# Altium PCB 铜基板拼板.PcbDoc
Units mm, origin at the board's own origin, x right, y up, seen from the top; angles counter-clockwise.
Board outline 156.4 x 92.83 mm, 2 copper layers (Top Layer, Bottom Layer); 16 components, 0 nets, 78 pads, 0 vias.
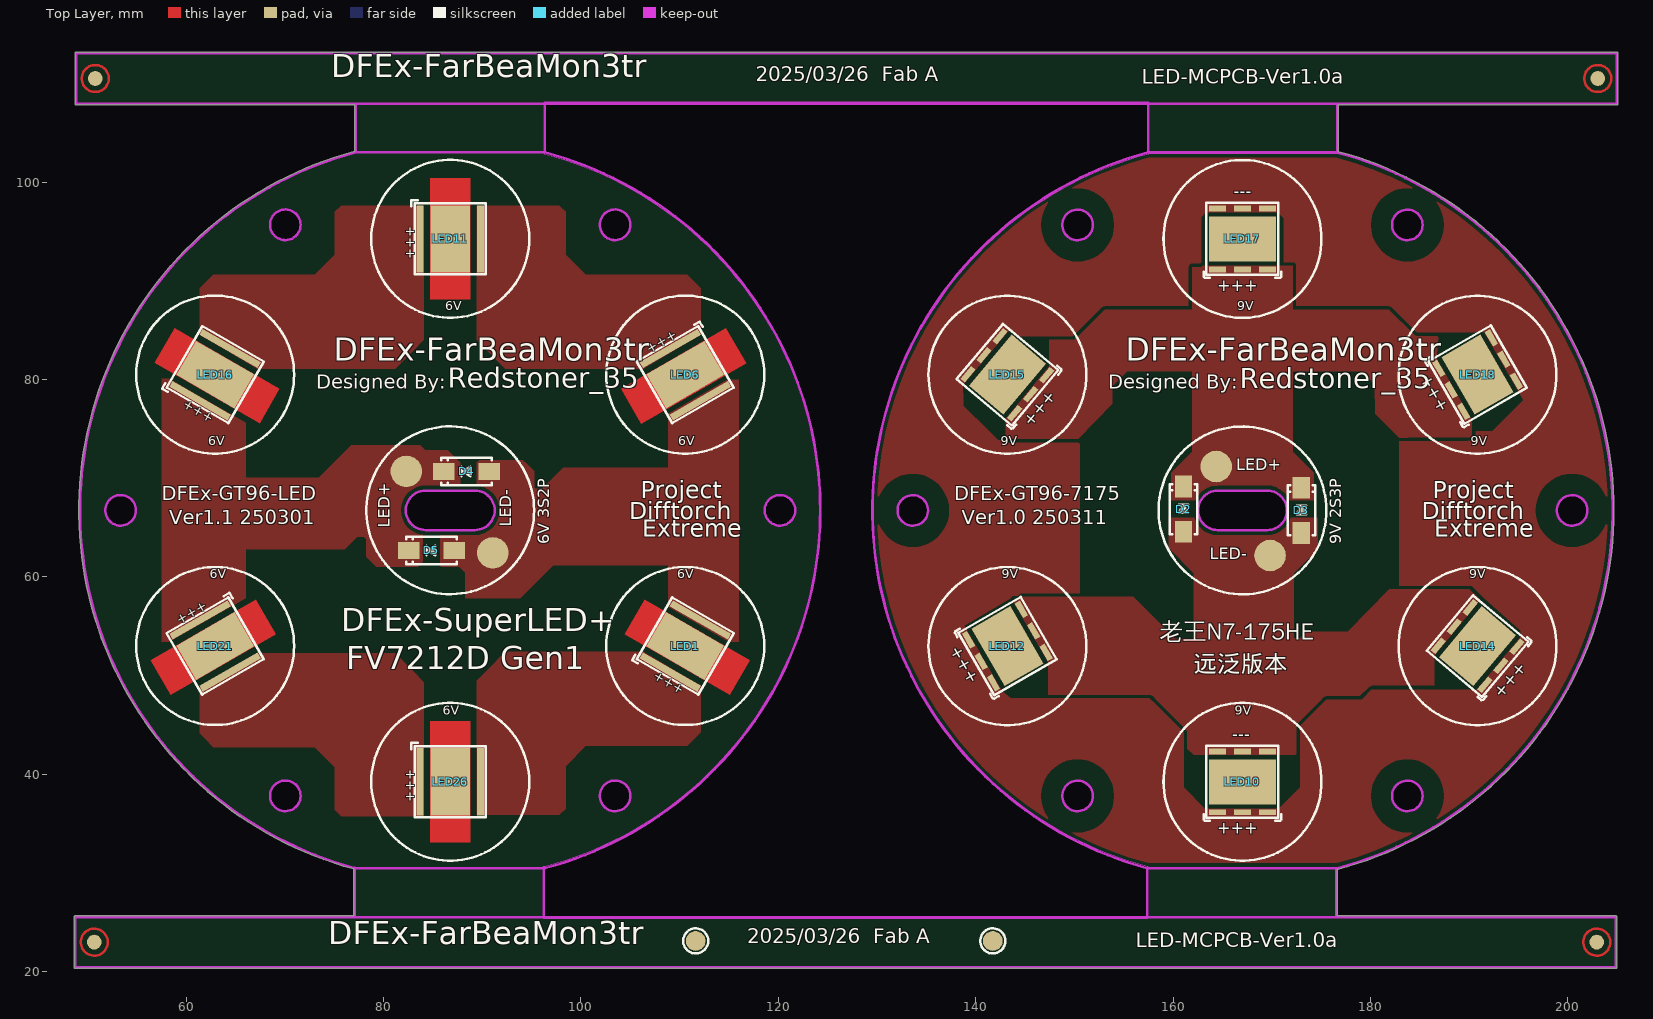
[diagram p0: Top Layer view]
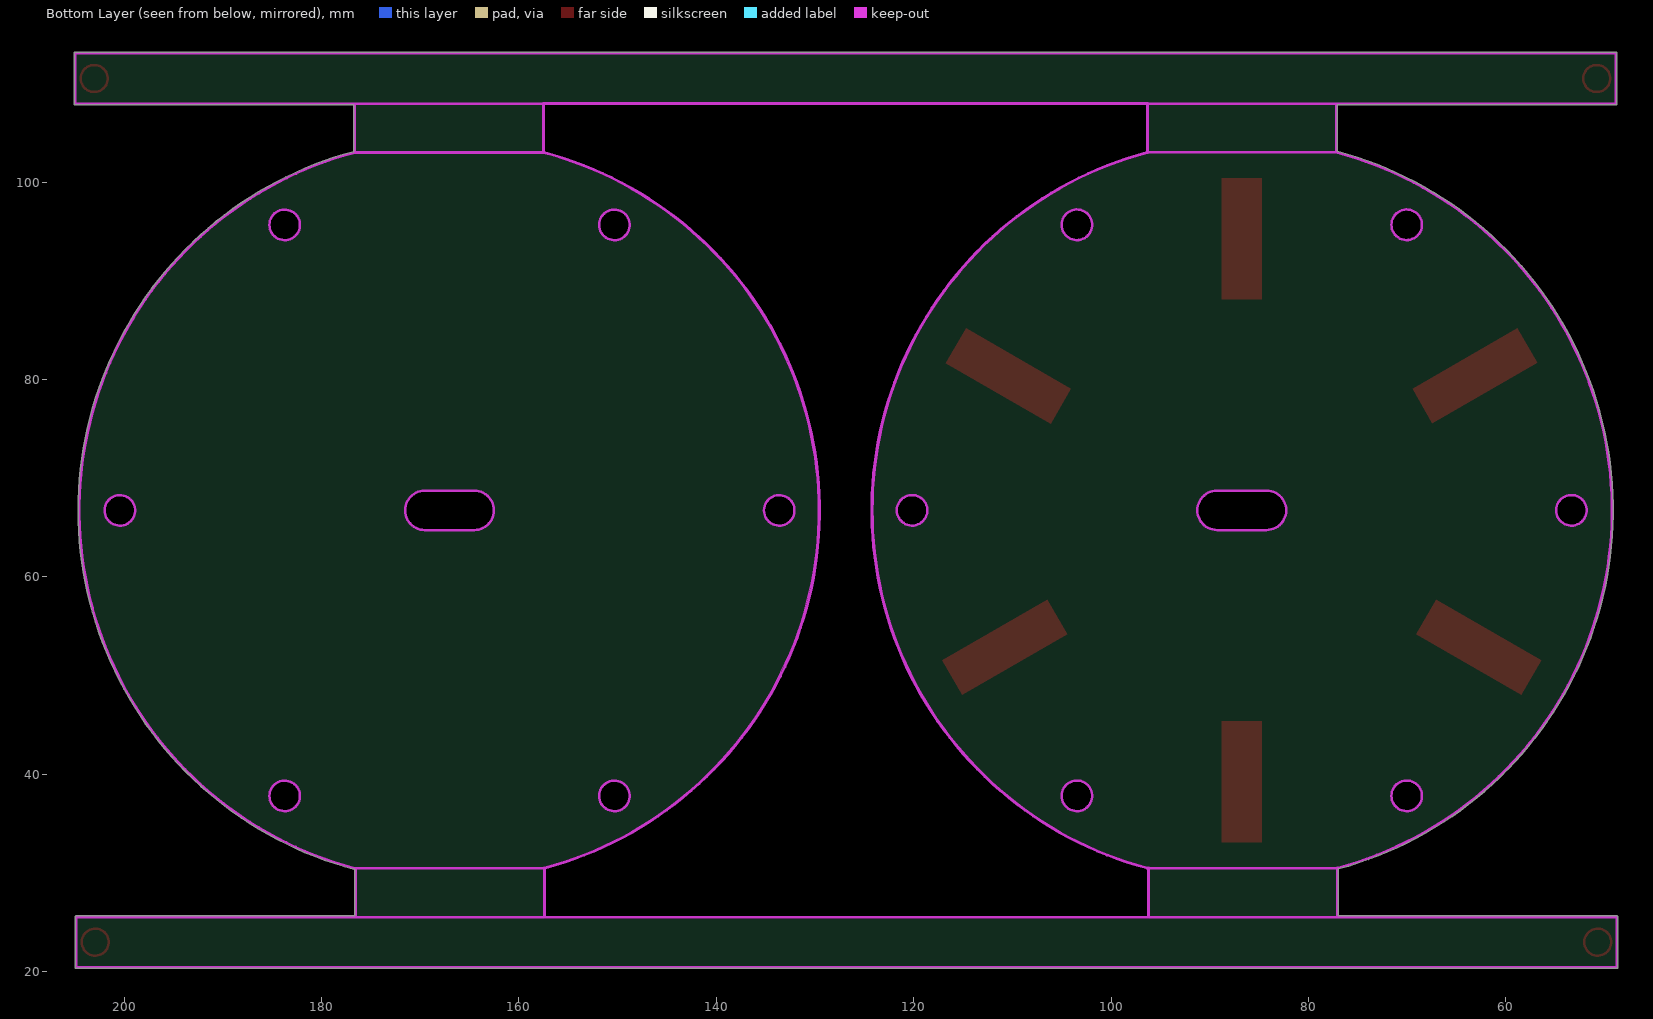
[diagram p1: Bottom Layer view, seen from below]

## Layer stack, top to bottom
Top Solder: solder mask 0.0102, Solder Resist, Dk 3.5
Top Layer: signal copper 0.0356
Dielectric 1: dielectric 0.32, FR-4, Dk 4.8
Bottom Layer: signal copper 0.0356
Bottom Solder: solder mask 0.0102, Solder Resist, Dk 3.5

## Board outline
48.665,20.452 ccw(c48.793,20.452) 48.793,20.324 204.83,20.324 ccw(c204.83,20.452) 204.958,20.452 204.958,25.532 ccw(c204.83,25.532) 204.83,25.659 176.637,25.659 176.637,30.366 176.668,30.366 ccw(c176.668,30.493) 176.701,30.37 ccw(c167.03,66.733) 204.657,66.733 ccw(c167.03,66.733) 176.739,103.087 176.739,107.823 204.933,107.823 ccw(c204.933,107.95) 205.06,107.95 205.06,113.03 ccw(c204.933,113.03) 204.933,113.157 48.895,113.157 ccw(c48.895,113.03) 48.768,113.03 48.768,107.95 ccw(c48.895,107.95) 48.895,107.823 77.089,107.823 77.089,103.103 ccw(c86.766,66.742) 76.986,30.408 76.986,25.659 48.793,25.659 ccw(c48.793,25.532) 48.665,25.532
cut-out: 96.118,25.532 ccw(c96.245,25.532) 96.245,25.404 157.378,25.404 ccw(c157.378,25.532) 157.505,25.532 157.505,30.485 ccw(c157.378,30.485) 157.505,30.491 ccw(c157.378,30.497) 157.505,30.497 ccw(c157.378,30.497) 157.41,30.62 cw(c167.03,66.733) 157.512,102.874 cw(c167.03,66.733) 157.512,102.874 ccw(c157.48,102.997) 157.607,102.997 157.607,107.95 ccw(c157.48,107.95) 157.48,108.077 96.348,108.077 ccw(c96.348,107.95) 96.22,107.95 96.22,102.997 ccw(c96.348,102.997) 96.316,102.874 cw(c86.766,66.742) 124.139,66.742 cw(c86.766,66.742) 96.371,30.625 ccw(c96.404,30.502) 96.314,30.592 ccw(c96.245,30.485) 96.118,30.485
cut-out: 148.779,37.806 cw(c150.329,37.806) 150.329,39.356 cw(c150.329,37.806) 151.879,37.806 cw(c150.329,37.806) 150.329,36.256 cw(c150.329,37.806)
cut-out: 182.181,37.806 ccw(c183.731,37.806) 183.731,36.256 ccw(c183.731,37.806) 185.281,37.806 ccw(c183.731,37.806) 183.731,39.356 ccw(c183.731,37.806)
cut-out: 198.882,66.733 ccw(c200.432,66.733) 200.432,65.183 ccw(c200.432,66.733) 201.982,66.733 ccw(c200.432,66.733) 200.432,68.283 ccw(c200.432,66.733)
cut-out: 182.181,95.66 ccw(c183.731,95.66) 183.731,94.11 ccw(c183.731,95.66) 185.281,95.66 ccw(c183.731,95.66) 183.731,97.21 ccw(c183.731,95.66)
cut-out: 150.329,94.11 cw(c150.329,95.66) 148.779,95.66 cw(c150.329,95.66) 150.329,97.21 cw(c150.329,95.66) 151.879,95.66 cw(c150.329,95.66)
cut-out: 133.628,65.183 cw(c133.628,66.733) 132.078,66.733 cw(c133.628,66.733) 133.628,68.283 cw(c133.628,66.733) 135.178,66.733 cw(c133.628,66.733)
cut-out: 164.53,64.733 169.53,64.733 ccw(c169.53,66.733) 169.53,68.733 164.53,68.733 ccw(c164.53,66.733)
cut-out: 84.266,64.742 89.266,64.742 ccw(c89.266,66.742) 89.266,68.742 84.266,68.742 ccw(c84.266,66.742)
cut-out: 53.364,65.192 cw(c53.364,66.742) 51.814,66.742 cw(c53.364,66.742) 53.364,68.292 cw(c53.364,66.742) 54.914,66.742 cw(c53.364,66.742)
cut-out: 70.065,94.119 cw(c70.065,95.669) 68.515,95.669 cw(c70.065,95.669) 70.065,97.219 cw(c70.065,95.669) 71.615,95.669 cw(c70.065,95.669)
cut-out: 101.917,95.669 ccw(c103.467,95.669) 103.467,94.119 ccw(c103.467,95.669) 105.017,95.669 ccw(c103.467,95.669) 103.467,97.219 ccw(c103.467,95.669)
cut-out: 118.618,66.742 ccw(c120.168,66.742) 120.168,65.192 ccw(c120.168,66.742) 121.718,66.742 ccw(c120.168,66.742) 120.168,68.292 ccw(c120.168,66.742)
cut-out: 101.917,37.815 ccw(c103.467,37.815) 103.467,36.265 ccw(c103.467,37.815) 105.017,37.815 ccw(c103.467,37.815) 103.467,39.365 ccw(c103.467,37.815)
cut-out: 68.515,37.815 cw(c70.065,37.815) 70.065,39.365 cw(c70.065,37.815) 71.615,37.815 cw(c70.065,37.815) 70.065,36.265 cw(c70.065,37.815)

## Design rules (kind name [scope] priority, off if disabled: settings)
Clearance [All] p1: gap=0.254
PolygonConnect [All] p1: connectstyle=Relief reliefconductorwidth=0.254 reliefentries=4 polygonreliefangle="90 Angle" airgapwidth=0.254
RoutingVias [All] p1: holewidth=0.711 width=1.27 viastyle="Through Hole" minholewidth=0.711 minwidth=1.27 maxholewidth=0.711 maxwidth=1.27
SolderMaskExpansion [All] p1: expansion=0.102
Width [All] p1: maxlimit=0.254 minlimit=0.254 preferedwidth=0.254
30 further rules are at their usual default settings.

## Components (designator, comment, footprint, x,y, rotation, side; value= is the part's Value field where it differs from the comment)
D2 "SB2060L" SMA 161.061,66.86 r90 top
D3 "SB2060L" SMA 172.999,66.733 r90 top
D4 "SB2060L" SMA 88.417,70.679 r180 top
D5 "SB2060L" SMA 84.861,62.678 r180 top
LED1 "FV7012I" XHP70.3HI 110.582,52.992 r240 top
LED6 "FV7012I" XHP70.3HI 110.582,80.492 r120 top
LED10 "FV7012I" N7175HE 167.03,39.233 r180 top
LED11 "FV7012I" XHP70.3HI 86.766,94.242 r180 top locked
LED12 "FV7012I" N7175HE 143.214,52.983 r120 top
LED14 "FV7012I" N7175HE 190.846,52.983 r230 top
LED15 "FV7012I" N7175HE 143.214,80.483 r230 top
LED16 "FV7012I" XHP70.3HI 62.95,80.492 r240 top locked
LED17 "FV7012I" N7175HE 167.03,94.233 r180 top
LED18 "FV7012I" N7175HE 190.846,80.483 r120 top
LED21 "FV7012I" XHP70.3HI 62.95,52.992 r120 top
LED26 "FV7012I" XHP70.3HI 86.766,39.242 r180 top locked

## Footprints (in the part's own frame and the unit in brackets; to place one, negate y for a bottom-side part, rotate by r counter-clockwise, add the part's x,y. Pads: shape width x height; smd on the part's side, far side on the other; paste and mask are expansions set on the pad)
N7175HE [mm] "夜巡老王N7-175HE灯珠（达立半导体A6-N60）"
  rect 6.76x4.56 smd mask+0.03: 0(0,0)
  rect 1.72x0.6 smd mask+0.03: W1N(-2.52,-3.08) W1P(-2.52,3.08) W2N(0,-3.08) W2P(0,3.08) W3N(2.52,-3.08) W3P(2.52,3.08)
  silkscreen extent -3.94,-3.65 3.94,3.94, body extent -3.68,-3.68 3.68,3.68, height 0.7
SMA [mm] "4.5x2.6*2.2mm（长宽高，不包括引脚）"
  rect 2.2x1.75 smd: 1(-2.3,0) 2(2.3,0)
  silkscreen extent -2.54,-1.4 2.54,1.4, body extent -2.53,-1.3 2.58,1.3, height 2.15
XHP70.3HI [mm] "第三代CREE XHP70 LED，平头HI版本"
  rect 4x6.8 smd mask+0.03: 0(0,0)
  rect 0.7x6.8 smd mask+0.03: 1(-3.05,0) 2(3.05,0)
  silkscreen extent -3.6,-3.94 3.94,3.6

## Free pads (board coordinates)
  round 1.5 smd mask+0.03: 0(50.698,22.992) 0(50.8,110.49) 0(202.925,22.992) 0(203.028,110.49)
  round 3.2 smd mask+0.03: 1(82.321,70.679) 1(164.363,71.178) 2(91.084,62.424) 2(169.824,62.161)
  round 2 smd mask+0.03: 1(141.732,23.114) 2(111.633,23.114)

## Nets (pads, with @x,y where several pads share a name; then routed paths per layer and width w, separated by ;. In a path a pad name is that pad's centre, name@x,y a point inside that pad or via, vN(x,y) a via of type N, cw(c..) or ccw(c..) an arc to the next point about the centre after c; other vN are vias at no path point)
pads on no net: D2.1 D2.2 D3.1 D3.2 D4.1 D4.2 D5.1 D5.2 LED1.0 LED1.1 LED1.2 LED6.0 LED6.1 LED6.2 LED10.0 LED10.W1N LED10.W1P LED10.W2N LED10.W2P LED10.W3N LED10.W3P LED11.0 LED11.1 LED11.2 LED12.0 LED12.W1N LED12.W1P LED12.W2N LED12.W2P LED12.W3N LED12.W3P LED14.0 LED14.W1N LED14.W1P LED14.W2N LED14.W2P LED14.W3N LED14.W3P LED15.0 LED15.W1N LED15.W1P LED15.W2N LED15.W2P LED15.W3N LED15.W3P LED16.0 LED16.1 LED16.2 LED17.0 LED17.W1N LED17.W1P LED17.W2N LED17.W2P LED17.W3N LED17.W3P LED18.0 LED18.W1N LED18.W1P LED18.W2N LED18.W2P LED18.W3N LED18.W3P LED21.0 LED21.1 LED21.2 LED26.0 LED26.1 LED26.2
copper on no net: | length 34.4
  Top Layer w0.254: 52.065,22.992 ccw(c50.698,22.992) 52.065,22.992 ; 52.168,110.49 ccw(c50.8,110.49) 52.168,110.49 ; 204.293,22.992 ccw(c202.925,22.992) 204.293,22.992 ; 204.396,110.49 ccw(c203.028,110.49) 204.396,110.49

## Polygon pours and split planes (outlines as drawn)
no net on Top Layer "Component Side-No Net 1" (solid, remove dead copper, pour order 26): 195.478,77.909 195.478,74.734 189.89,74.734 189.89,70.162 189.89,70.035 196.494,70.035 198.018,70.035 198.018,73.464 198.018,81.592 197.637,81.592 194.081,81.592 194.081,80.83
no net on Top Layer "Component Side-No Net 1" (solid, remove dead copper, pour order 25): 184.724,84.767 173.38,84.767 171.856,86.291 171.348,86.799 171.348,93.276 171.348,96.197 170.736,96.81 170.459,97.086 169.824,97.086 162.966,97.086 162.331,96.451 162.458,96.324 162.458,89.085 162.458,85.656 162.077,85.275 161.95,85.148 157.251,85.148 152.933,85.148 152.679,85.402 151.663,86.418 151.663,92.641 151.663,99.85 153.534,101.721 153.977,101.277 175.92,101.277 184.048,101.277 184.556,101.785 186.08,103.309 186.08,103.563
no net on Top Layer "Component Side-No Net 1" (solid, pour order 24): 187.35,59.113 182.905,59.113 182.905,73.718 191.541,73.718 191.795,73.972 194.081,73.972 192.684,72.575 192.684,59.113
no net on Top Layer "Component Side-No Net 1" (solid, pour order 23): 142.011,73.845 150.393,73.845 150.52,73.718 150.52,69.527 150.52,57.97 150.139,57.589 149.631,58.097 142.519,58.097 142.011,58.097 141.376,57.462 141.249,57.589 138.582,57.589 138.582,74.115 138.892,74.425
no net on Top Layer "Component Side-No Net 1" (solid, remove dead copper, pour order 21): 172.237,41.968 176.682,41.841 178.079,42.857 179.476,44.381 185.064,48.445 185.826,48.445 186.461,48.445 186.461,52.001 191.16,57.716 190.017,58.732 188.239,58.732 181.889,58.732 177.698,54.414 173.507,54.414 172.872,53.779 169.951,53.779 169.316,53.144 169.316,41.968
no net on Top Layer "Component Side-No Net 1" (solid, remove dead copper, pour order 22): 162.077,41.968 161.061,42.984 161.061,44.254 157.632,47.683 148.742,47.683 147.98,47.683 147.345,47.683 147.345,51.366 143.916,57.335 143.916,57.97 145.567,57.97 155.219,57.97 155.981,57.97 160.236,53.716 163.157,53.716 163.855,53.017 164.49,52.382 164.49,41.968
no net on Top Layer "Component Side-No Net 1" (solid, remove dead copper, pour order 17): 169.316,64.733 169.23,64.82 164.077,64.82 163.973,64.82 162.077,62.923 162.077,49.334 162.077,41.968 167.538,41.968 172.237,41.968 172.237,50.858 172.237,62.82 170.238,64.82
no net on Top Layer "Component Side-No Net 1" (solid, remove dead copper, pour order 19): 190.271,75.877 186.715,82.1 186.863,84.64 184.407,84.577 181.93,87.053 171.539,87.053 171.539,86.609 171.539,80.83 179.095,80.83 180.429,79.497 180.492,76.512 182.905,74.099 190.271,74.163
no net on Top Layer "Component Side-No Net 1" (solid, remove dead copper, pour order 20): 143.027,76.004 147.472,81.338 147.472,84.386 149.844,84.386 152.511,87.053 162.712,87.053 162.712,86.418 162.712,80.83 155.346,80.83 153.822,79.306 153.822,77.528 150.393,73.972 143.027,73.972
no net on Top Layer "Component Side-No Net 1" (solid, remove dead copper, pour order 18): 164.871,68.733 164.957,68.647 170.111,68.647 170.214,68.647 172.11,70.543 172.11,84.132 172.11,91.498 166.649,91.498 161.95,91.498 161.95,82.608 161.95,70.647 163.95,68.647
no net on Top Layer "Component Side-No Net 1" (solid, remove dead copper, pour order 15): 195.478,77.909 185.064,67.495 185.064,62.669 185.064,61.399 186.842,59.621 187.35,59.113 189.636,59.113 190.271,59.113 191.541,57.843 195.224,54.541 195.224,53.906 190.779,48.572 180.111,48.572 179.095,47.556 176.428,47.556 175.539,47.556 173.507,45.524 172.872,44.889 172.872,40.444 172.872,38.666 171.348,37.142 170.713,36.507 163.22,36.507 161.061,38.666 161.061,43.238 161.061,44.254 157.632,47.683 143.535,47.683 142.646,48.445 138.836,55.049 144.043,58.097 144.297,58.097 145.186,58.986 145.186,61.272 145.186,61.907 144.17,62.923 143.662,62.415 125.374,62.415 125.374,28.379 124.739,27.744 133.502,18.981 176.682,18.981 213.385,18.981 216.179,21.775 221.64,27.236 221.64,83.497
no net on Top Layer "Component Side-No Net 1" (solid, remove dead copper, pour order 14): 191.541,84.767 184.175,84.767 177.571,91.371 177.444,91.498 172.999,91.498 171.602,91.498 171.221,91.879 171.221,95.943 171.221,96.324 170.586,96.959 168.681,96.959 163.347,96.959 162.966,96.578 162.839,96.451 162.839,93.403 162.839,91.879 162.331,91.371 157.378,91.371 157.124,91.371 150.139,84.386 144.678,84.386 144.424,84.386 143.916,84.894 143.281,84.894 138.709,79.433 138.836,74.607 138.836,74.48 141.503,71.813 145.186,68.13 145.186,61.78 145.186,61.272 144.297,60.383 143.662,59.748 126.644,59.748 126.644,95.689 125.755,96.578 139.217,110.04 139.217,110.421 173.507,110.421 174.523,111.437 178.46,107.5 200.177,107.5 204.241,107.5 212.75,98.991 213.766,97.975 213.766,77.02 213.766,71.051 213.512,70.797 212.623,69.908 200.685,69.908 199.923,69.908 195.097,78.671
no net on Top Layer "Component Side-No Net 1" (solid, remove dead copper, pour order 16): 138.455,77.655 141.503,74.607 143.281,72.829 145.186,70.924 145.186,66.152 145.186,64.32 138.836,55.049 139.852,53.017 132.486,53.652 132.486,72.956 132.232,73.21 132.232,74.099 132.486,74.353
no net on Top Layer "Component Side-No Net 1" (solid, remove dead copper, pour order 35): 170.628,69.062 170.628,67.961 170.713,67.876 170.84,67.749 174.269,67.749 174.269,70.543 173.38,71.432 171.729,73.083 168.808,73.083 162.331,73.083 159.791,70.543 159.791,67.749 169.824,67.749 170.205,68.13
no net on Top Layer "Component Side-No Net 1" (solid, remove dead copper, pour order 37): 159.537,65.971 174.65,65.971 174.65,62.796 172.237,60.383 163.855,60.383 162.077,60.383 159.537,62.923 159.537,64.32
no net on Top Layer "Component Side-No Net 1" (solid, remove dead copper, pour order 16): 84.099,35.754 84.099,49.343 82.956,50.486 81.178,52.264 67.208,52.264 61.366,48.835 61.366,45.787 61.366,44.263 61.366,44.136 61.874,43.628 62.763,42.739 65.811,42.739 73.05,42.739 75.082,40.707 75.082,36.897 75.082,36.389 75.717,35.754
no net on Top Layer "Component Side-No Net 1" (solid, remove dead copper, pour order 17): 84.099,97.603 84.099,84.014 82.956,82.871 81.178,81.093 67.208,81.093 61.366,84.522 61.366,87.57 61.366,89.094 61.366,89.221 61.874,89.729 62.763,90.618 65.811,90.618 73.05,90.618 75.082,92.65 75.082,96.46 75.082,96.968 75.717,97.603
no net on Top Layer "Component Side-No Net 1" (solid, remove dead copper, pour order 18): 89.433,35.881 89.433,49.47 90.576,50.613 92.354,52.391 106.324,52.391 112.166,48.962 112.166,45.914 112.166,44.39 112.166,44.263 111.658,43.755 110.769,42.866 107.721,42.866 100.482,42.866 98.45,40.834 98.45,37.024 98.45,36.516 97.815,35.881
no net on Top Layer "Component Side-No Net 1" (solid, remove dead copper, pour order 19): 89.433,97.603 89.433,84.014 90.576,82.871 92.354,81.093 106.324,81.093 112.166,84.522 112.166,87.57 112.166,89.094 112.166,89.221 111.658,89.729 110.769,90.618 107.721,90.618 100.482,90.618 98.45,92.65 98.45,96.46 98.45,96.968 97.815,97.603
no net on Top Layer "Component Side-No Net 1" (solid, remove dead copper, pour order 14): 84.266,68.751 84.226,68.791 84.226,72.584 84.226,72.838 83.845,73.219 83.718,73.346 81.559,73.346 76.733,73.346 74.701,71.314 73.431,70.044 62.509,70.044 62.509,61.027 64.287,62.805 69.621,62.805 76.098,62.805 78.13,64.837 79.455,66.161 82.352,66.161
no net on Top Layer "Component Side-No Net 1" (solid, remove dead copper, pour order 13): 57.556,79.823 57.556,80.077 58.318,80.077 66.065,75.632 66.065,72.965 66.065,57.834 65.676,57.611 64.541,56.963 58.318,53.407 57.556,53.407
no net on Top Layer "Component Side-No Net 1" (solid, remove dead copper, pour order 12): 108.737,61.154 98.704,61.154 97.18,61.154 94.767,58.741 93.878,57.852 88.29,57.852 88.29,67.123 87.909,67.504 88.036,67.631 94.513,67.631 94.767,67.631 97.688,70.552 98.196,71.06 112.928,71.06 112.928,61.662 112.42,61.154
no net on Top Layer "Component Side-No Net 1" (solid, remove dead copper, pour order 11): 114.833,79.95 115.976,79.95 115.976,72.838 115.976,53.407 114.96,53.407 108.864,56.963 108.864,76.521
no net on Top Layer "Component Side-No Net 1" (solid, remove dead copper, pour order 23): 89.462,68.732 89.462,71.597 89.687,71.822 92.1,71.822 94.132,71.822 94.513,71.441 95.275,70.679 95.275,69.028 95.402,68.901 96.291,68.901 96.037,68.012 96.037,65.345 96.037,64.456 95.275,63.694 91.465,59.884 90.068,59.884 88.798,59.884 87.655,61.027 85.877,61.027 85.75,61.154 85.75,64.742 85.75,65.345 85.877,65.472 88.544,68.139 89.052,68.139
no net on Top Layer "Component Side-No Net 1" (solid, remove dead copper, pour order 25): 86.512,72.838 87.528,71.822 87.655,71.695 87.782,71.568 87.782,68.742 87.782,65.345 87.02,64.583 86.861,64.742 84.353,64.742 84.353,64.71 83.972,64.329 83.972,63.186 83.972,61.535 83.464,61.027 80.162,61.027 79.273,61.027 78.257,62.043 78.257,63.567 78.257,63.821 78.003,64.075 76.86,64.075 76.86,67.123 76.606,67.377 77.495,68.266 77.495,72.838

## Keep-outs
Keep-Out Layer:
  circle w0.254: c200.432,66.733 r1.55
  circle w0.254: c183.731,37.806 r1.55
  circle w0.254: c150.322,37.806 r1.55
  circle w0.254: c133.628,66.733 r1.55
  circle w0.254: c150.322,95.66 r1.55
  circle w0.254: c183.731,95.66 r1.55
  circle w0.254: c103.467,95.669 r1.55
  circle w0.254: c70.058,95.669 r1.55
  circle w0.254: c53.364,66.742 r1.55
  circle w0.254: c70.058,37.815 r1.55
  circle w0.254: c103.467,37.815 r1.55
  circle w0.254: c120.168,66.742 r1.55
  lines w0.254: 77.114,30.502 96.404,30.502 ccw(c86.766,66.742) 96.348,102.997 ; 77.114,30.505 cw(c86.766,66.742) 77.216,103.005 ; 157.378,30.497 cw(c167.03,66.733) 157.48,102.997 ; 157.48,102.989 176.612,102.989 cw(c167.03,66.733) 176.668,30.493 157.378,30.493 176.509,30.493 ; 77.114,25.532 77.114,30.485 96.245,30.485 96.245,26.339 96.245,25.532 ; 77.114,25.532 96.245,25.532 ; 77.114,25.532 48.793,25.532 48.793,20.452 204.83,20.452 204.83,25.532 176.509,25.532 ; 77.216,107.95 48.895,107.95 48.895,113.03 204.933,113.03 204.933,107.95 176.612,107.95 ; 77.216,107.95 96.348,107.95 ; 77.216,107.95 77.216,102.997 96.348,102.997 ; 96.245,25.532 153.822,25.532 157.378,25.532 ; 96.348,102.997 96.348,107.143 96.348,107.95 ; 96.348,107.95 153.924,107.95 157.48,107.95 ; 157.378,25.532 176.509,25.532 ; 157.378,25.532 157.378,30.485 176.509,30.485 176.509,26.339 176.509,25.532 ; 157.48,102.997 176.612,102.997 176.612,107.143 176.612,107.95 ; 157.48,102.997 157.48,107.95 ; 157.48,107.95 176.612,107.95 ; 84.266,64.742 cw(c84.266,66.742) 84.266,68.742 89.266,68.742 cw(c89.266,66.742) 89.266,64.742 84.266,64.742 ; 164.53,64.733 cw(c164.53,66.733) 164.53,68.733 169.53,68.733 cw(c169.53,66.733) 169.53,64.733 164.53,64.733

## Other copper
Top Layer:
  region: 56.407,51.561 58.44,48.038 69.109,54.198 67.075,57.72
  region: 104.038,79.061 106.1,75.49 116.768,81.65 114.707,85.22
  region: 106.457,57.72 104.423,54.198 115.092,48.038 117.126,51.561
  region: 58.826,85.22 56.787,81.69 67.456,75.53 69.494,79.061
  rectangle: 84.734,33.078 88.798,45.397
  rectangle: 84.734,88.078 88.798,100.397

## Silkscreen, mask and mechanical layers (free items; w line width, h text height)
Top Overlay:
  circle w0.254: c141.732,23.114 r1.27
  circle w0.254: c111.633,23.114 r1.27
  circle w0.254: c167.03,66.733 r8.5
  circle w0.254: c143.214,80.483 r8
  circle w0.254: c143.214,52.983 r8
  circle w0.254: c167.03,39.233 r8
  circle w0.254: c190.846,52.983 r8
  circle w0.254: c190.846,80.483 r8
  circle w0.254: c167.03,94.233 r8
  circle w0.254: c86.766,94.242 r8
  circle w0.254: c110.582,80.492 r8
  circle w0.254: c110.582,52.992 r8
  circle w0.254: c86.766,39.242 r8
  circle w0.254: c62.95,52.992 r8
  circle w0.254: c62.95,80.492 r8
  circle w0.254: c86.766,66.742 r8.5
  text "DFEx-FarBeaMon3tr" at 74.701,109.795 h4
  text "2025/03/26  Fab A" at 117.729,109.728 h2.54
  text "LED-MCPCB-Ver1.0a" at 156.845,109.474 h2.54
  text "---" at 166.141,98.102 h2
  text "6V" at 86.258,86.681 h1.6
  text "9V" at 166.522,86.672 h1.6
  text "DFEx-FarBeaMon3tr" at 74.955,81.093 h4
  text "DFEx-FarBeaMon3tr" at 155.219,81.084 h4
  text "Designed By:" at 73.177,78.553 h2.5
  text "Designed By:" at 153.441,78.544 h2.5
  text "Redstoner_35" at 86.512,78.426 h3.5
  text "Redstoner_35" at 166.776,78.417 h3.5
  text "6V" at 62.255,72.965 h1.6
  text "6V" at 109.88,72.965 h1.6
  text "9V" at 142.519,72.956 h1.6
  text "9V" at 190.144,72.956 h1.6
  text "LED+" at 166.395,70.416 h2
  text "Project" at 106.07,67.377 h3
  text "Project" at 186.334,67.368 h3
  text "DFEx-GT96-LED" at 57.556,67.25 h2.5
  text "DFEx-GT96-7175" at 137.82,67.241 h2.5
  text "Difftorch" at 104.927,65.218 h3
  text "Difftorch" at 185.191,65.209 h3
  text "LED-" at 93.37,65.091 h2 r90
  text "LED+" at 81.051,64.964 h2 r90
  text "Ver1.1 250301" at 58.318,64.837 h2.5
  text "Ver1.0 250311" at 138.582,64.828 h2.5
  text "Extreme" at 106.197,63.44 h3
  text "Extreme" at 186.461,63.431 h3
  text "6V 3S2P" at 97.18,63.313 h2 r90
  text "9V 2S3P" at 177.444,63.304 h2 r90
  text "LED-" at 163.728,61.399 h2
  text "6V" at 62.382,59.503 h1.6
  text "6V" at 109.753,59.503 h1.6
  text "9V" at 142.646,59.494 h1.6
  text "9V" at 190.017,59.494 h1.6
  text "DFEx-SuperLED+" at 75.717,53.661 h4
  text "老王N7-175HE" at 158.648,53.017 h3
  text "FV7212D Gen1" at 76.225,49.851 h4
  text "远泛版本" at 162.077,49.715 h3
  text "6V" at 86.004,45.66 h1.6
  text "9V" at 166.268,45.651 h1.6
  text "---" at 166.014,43.111 h2
  text "2025/03/26  Fab A" at 116.84,22.352 h2.54
  text "DFEx-FarBeaMon3tr" at 74.422,21.971 h4
  text "LED-MCPCB-Ver1.0a" at 156.21,21.971 h2.54
Top Solder:
  circle w0.508: c50.698,22.992 r0.889
  circle w0.508: c202.925,22.992 r0.889
  circle w0.508: c203.028,110.49 r0.889
  circle w0.508: c50.8,110.49 r0.889
  region: 105.054,78.426 106.007,76.776 106.777,77.221 105.824,78.87
  region: 114.008,83.632 114.96,81.982 115.73,82.426 114.778,84.076
  region: 57.423,50.926 58.375,49.276 59.145,49.721 58.193,51.37
  region: 66.376,56.132 67.329,54.482 68.099,54.926 67.146,56.576
  region: 115.34,51.37 114.387,49.721 115.157,49.276 116.11,50.926
  region: 106.386,56.576 105.434,54.926 106.204,54.482 107.156,56.132
  region: 58.755,84.076 57.802,82.426 58.572,81.982 59.525,83.632
  region: 67.708,78.87 66.756,77.221 67.526,76.776 68.478,78.426
  rectangle: 85.877,43.873 87.782,44.762
  rectangle: 86.004,33.459 87.909,34.348
  rectangle: 86.004,88.459 87.909,89.348
  rectangle: 85.877,98.873 87.782,99.762
  lines w2: 148.615,44.127 154.584,44.127 156.743,41.968 156.743,33.84 ; 149.885,88.45 151.155,89.72 154.711,89.72 157.251,92.26 157.251,100.261 ; 177.063,99.372 177.063,92.768 179.73,90.101 185.572,90.101 186.334,89.339 ; 177.444,33.713 177.444,41.333 180.619,44.508 184.429,44.508 185.191,44.508
Mechanical 3:
  lines w0.254: 40.919,30.497 47.142,30.497 ; 41.021,102.997 47.244,102.997 ; 46.126,29.481 47.142,30.497 ; 46.126,31.513 47.142,30.497 ; 46.228,101.981 47.244,102.997 ; 46.228,104.013 47.244,102.997 ; 48.793,30.489 204.831,30.489 ; 48.895,102.989 204.933,102.989
  text "V-CUT" at 33.528,102.235 h2.54
  text "V-CUT" at 33.426,29.735 h2.54
Mechanical 6:
  circle w0.254: c183.731,95.66 r3.2
  circle w0.254: c200.432,66.733 r3.2
  circle w0.254: c183.731,37.806 r3.2
  circle w0.254: c150.329,37.806 r3.2
  circle w0.254: c133.628,66.733 r3.2
  circle w0.254: c150.329,95.66 r3.2
  circle w0.254: c120.168,66.742 r3.2
  circle w0.254: c103.467,95.669 r3.2
  circle w0.254: c70.065,95.669 r3.2
  circle w0.254: c53.364,66.742 r3.2
  circle w0.254: c70.065,37.815 r3.2
  circle w0.254: c103.467,37.815 r3.2

## Text inside footprints (layer, text, board x,y; h text height)
LED1: Top Overlay "+++" at 107.069,49.447 h1.65 r330
LED6: Top Overlay "+++" at 109.269,85.306 h1.65 r210
LED10: Top Overlay "+++" at 168.554,35.423 h2 r180
LED11: Top Overlay "+++" at 81.94,95.512 h1.65 r270
LED12: Top Overlay "+++" at 140.677,49.759 h2 r120
LED14: Top Overlay "+++" at 194.744,51.702 h2 r230
LED15: Top Overlay "+++" at 147.113,79.202 h2 r230
LED16: Top Overlay "+++" at 59.438,76.947 h1.65 r330
LED17: Top Overlay "+++" at 168.554,90.423 h2 r180
LED18: Top Overlay "+++" at 188.308,77.259 h2 r120
LED21: Top Overlay "+++" at 61.637,57.806 h1.65 r210
LED26: Top Overlay "+++" at 81.94,40.512 h1.65 r270